# Altium PCB LaserControlBoard.PcbDoc
Units mm, origin at the board's own origin, x right, y up, seen from the top; angles counter-clockwise.
Board outline 112.65 x 119.38 mm, 2 copper layers (Top Layer, Bottom Layer); 111 components, 122 nets, 405 pads, 52 vias.
Unrouted connection lines stored in the file: 114.
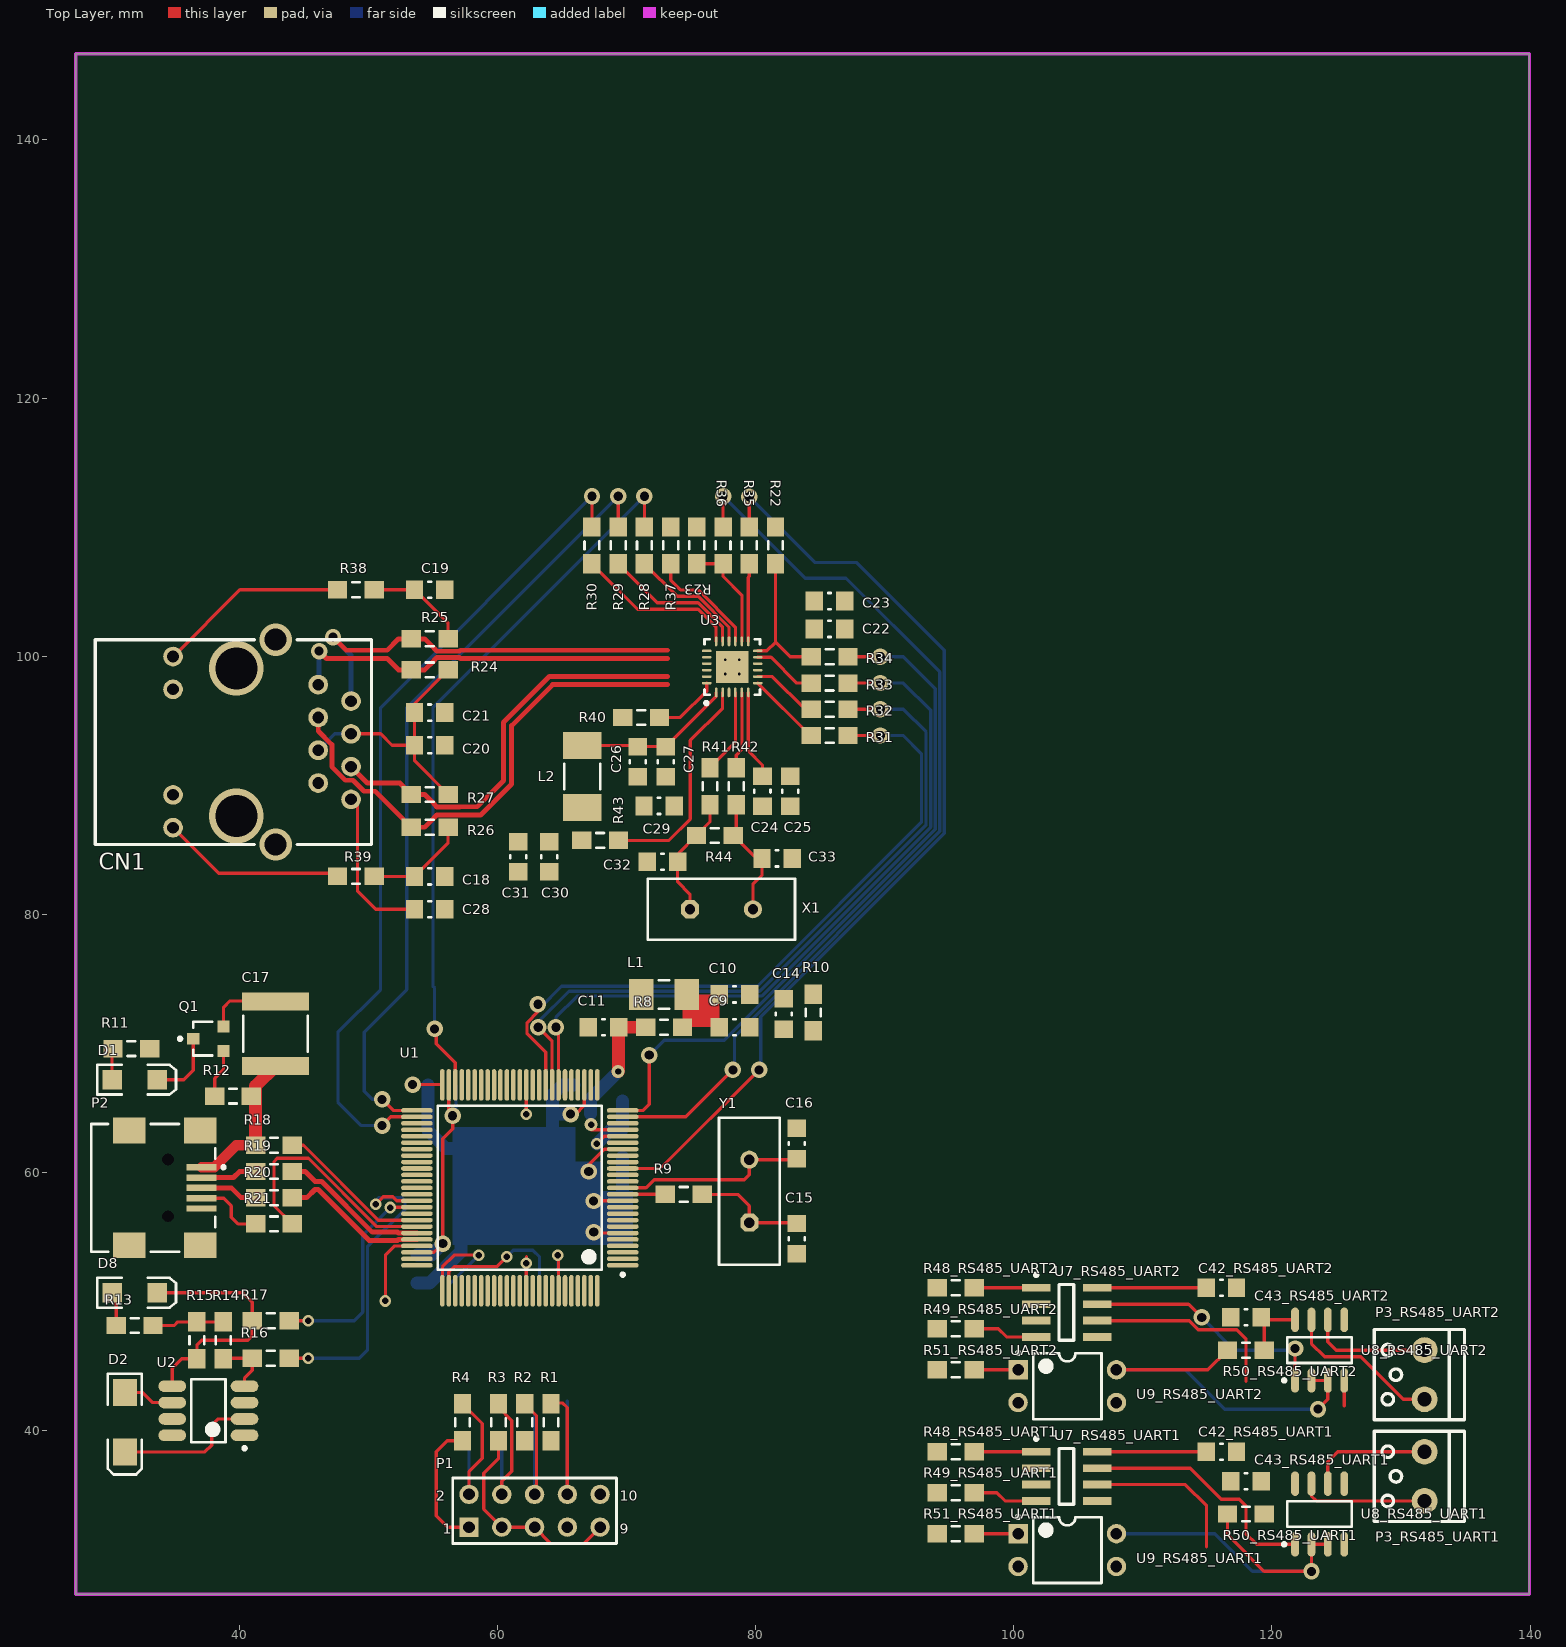
[diagram p0: Top Layer view]
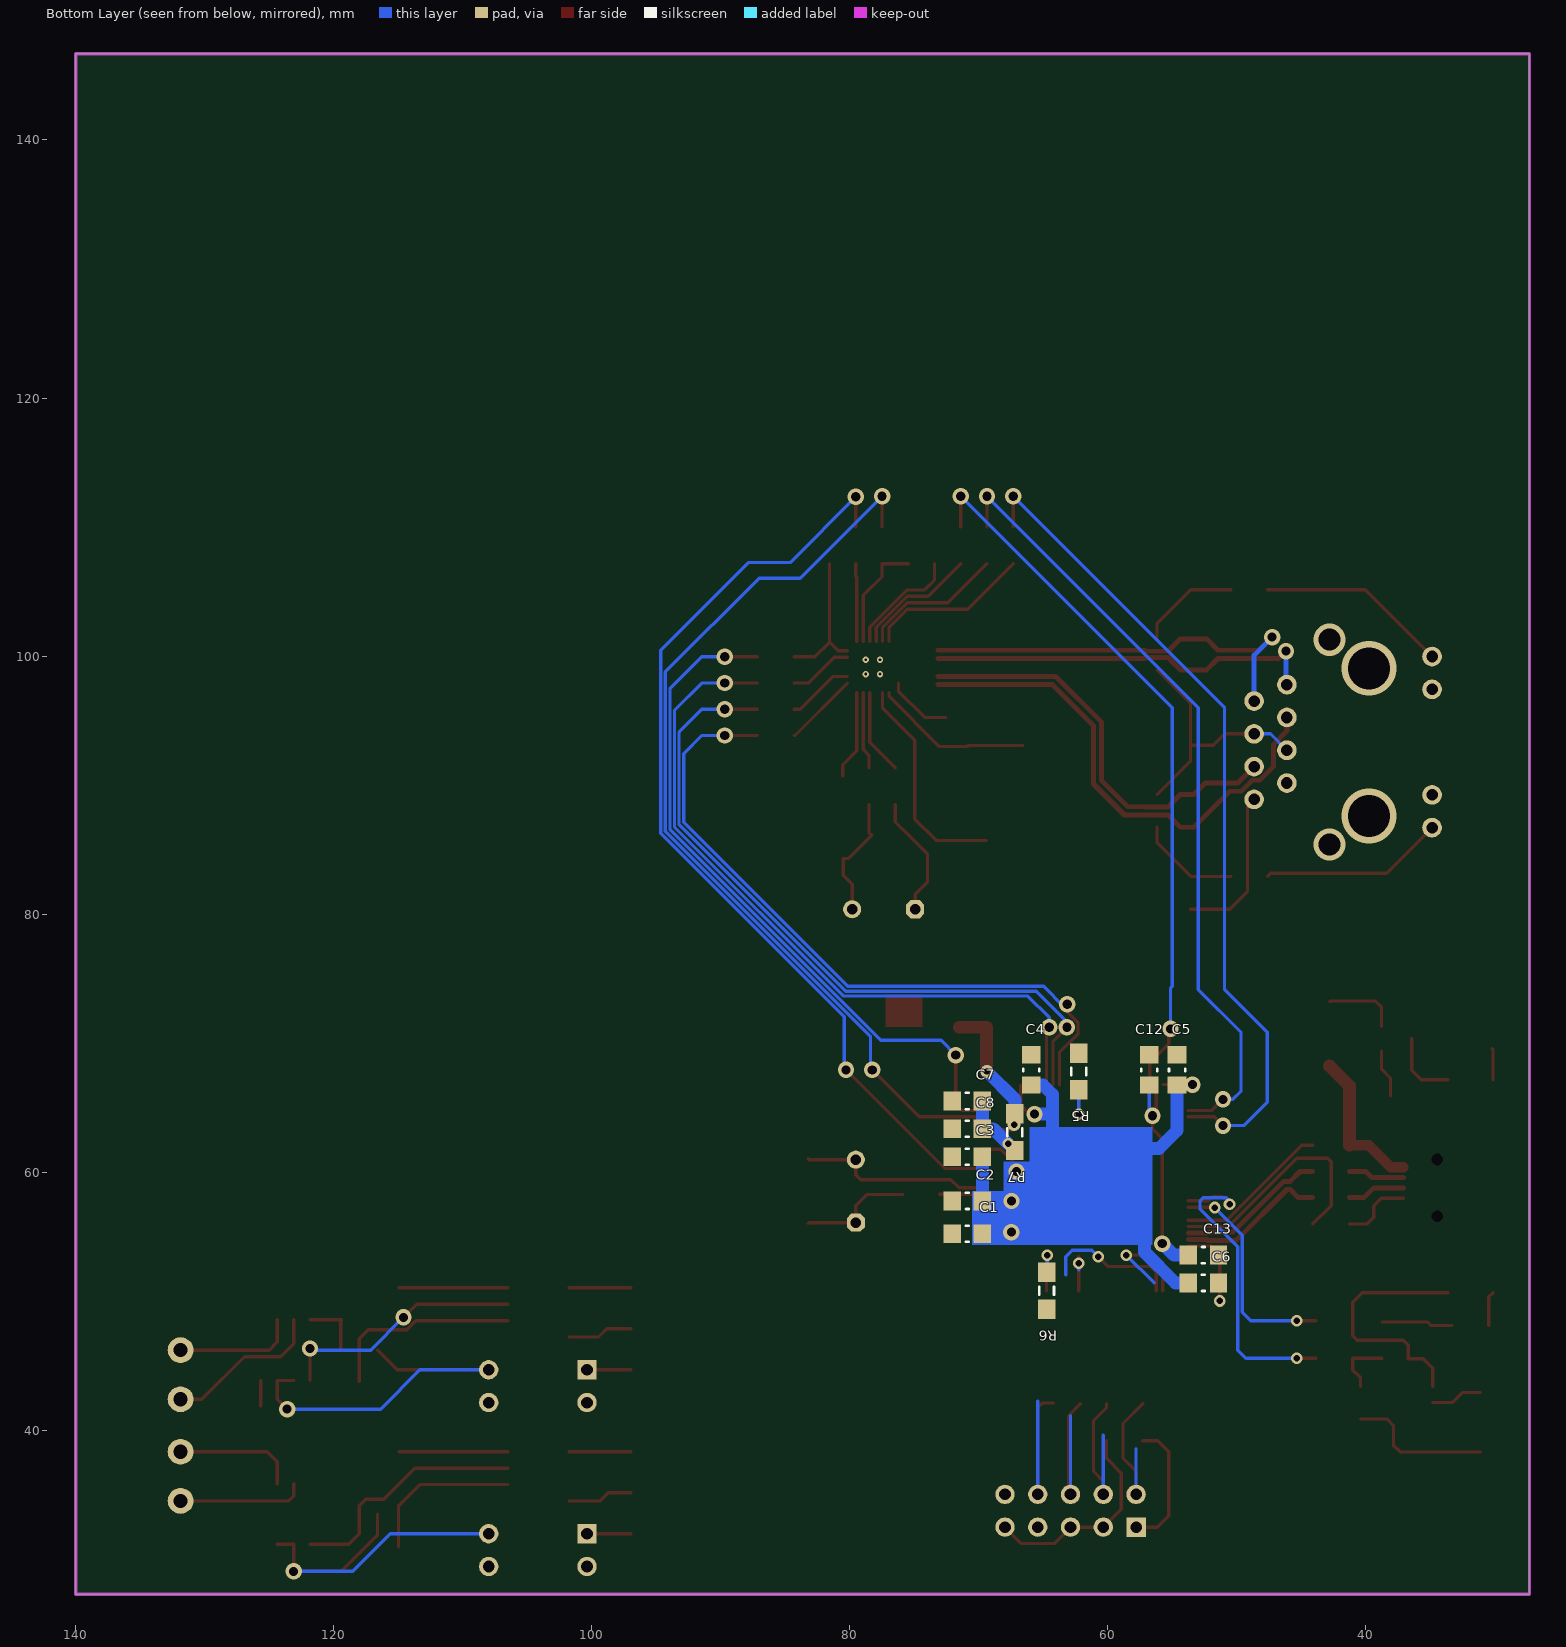
[diagram p1: Bottom Layer view, seen from below]

## Layer stack, top to bottom
Top Solder: solder mask 0.0102, Solder Resist, Dk 3.5
Top Layer: signal copper 0.0356
Dielectric 1: dielectric 0.32, FR-4, Dk 4.8
Bottom Layer: signal copper 0.0356
Bottom Solder: solder mask 0.0102, Solder Resist, Dk 3.5

## Board outline
27.305,27.305 139.954,27.305 139.954,146.685 27.305,146.685

## Design rules (kind name [scope] priority, off if disabled: settings)
Clearance [All] p1: gap=0.1
DiffPairsRouting [All] p1: maxlimit=0.254 minlimit=0.254 mostfreqgap=0.254 toplayer_minwidth=0.381 toplayer_maxwidth=0.381 toplayer_prefwidth=0.381 bottomlayer_minwidth=0.381 bottomlayer_maxwidth=0.381 bottomlayer_prefwidth=0.381 maxuncoupledlength=12.7
MinimumSolderMaskSliver [All] p1: minsoldermaskwidth=0
PolygonConnect [All] p1: connectstyle=Relief reliefconductorwidth=0.254 reliefentries=4 polygonreliefangle="90 Angle" airgapwidth=0.254
RoomDefinition EthernetPHY [InComponentClass('EthernetPHY')] p1: confinementstyle=ConfineIn formatcopy=TRUE lockcomponents=FALSE outline 92.71,114.935 27.94,114.935 27.94,77.47 92.71,77.47
RoomDefinition RS485_UART1 [InComponentClass('RS485_UART1')] p2: confinementstyle=ConfineIn formatcopy=TRUE lockcomponents=FALSE outline 92.71,27.94 135.89,27.94 135.89,40.64 92.71,40.64
RoomDefinition MCU [InComponentClass('MCU')] p3: confinementstyle=ConfineIn formatcopy=TRUE lockcomponents=FALSE outline 92.71,77.47 47.625,77.47 47.625,27.94 92.71,27.94
RoomDefinition RS485_UART2 [InComponentClass('RS485_UART2')] p4: confinementstyle=ConfineIn formatcopy=TRUE lockcomponents=FALSE outline 92.71,40.64 135.89,40.64 135.89,53.34 92.71,53.34
RoomDefinition "USB OTG" [InComponentClass('USB OTG')] p5: confinementstyle=ConfineIn formatcopy=TRUE lockcomponents=FALSE outline 47.625,77.47 27.94,77.47 27.94,27.94 47.625,27.94
RoutingVias [InNetClass('SignalNets')] p1: holewidth=0.5 width=0.9 viastyle="Through Hole" minholewidth=0.5 minwidth=0.9 maxholewidth=0.8 maxwidth=1.2
RoutingVias RoutingVias_PowerNets [InNetClass('AnalogPowerNets')] p2: holewidth=1 width=1.4 viastyle="Through Hole" minholewidth=0.5 minwidth=1 maxholewidth=1 maxwidth=1.4
RoutingVias RoutingVias_AnalogPowerNets [InNetClass('AnalogPowerNets')] p3: holewidth=0.5 width=0.9 viastyle="Through Hole" minholewidth=0.5 minwidth=1 maxholewidth=0.7 maxwidth=1.2
RoutingVias RoutingVias_All [All] p4: holewidth=0.711 width=1.27 viastyle="Through Hole" minholewidth=0.711 minwidth=1.27 maxholewidth=0.711 maxwidth=1.27
SolderMaskExpansion [All] p1: expansion=0.102
Width [InNetClass('SignalNets')] p1: maxlimit=1.016 minlimit=0.254 preferedwidth=0.254
Width Width_AnalogPowerNets [InNetClass('AnalogPowerNet')] p2: maxlimit=1.016 minlimit=0.128 preferedwidth=0.508
Width Width_PowerNets [InNetClass('PowerNet')] p3: maxlimit=1.016 minlimit=0.128 preferedwidth=0.508
Width Width_All [All] p4: maxlimit=0.254 minlimit=0.254 preferedwidth=0.254
27 further rules are at their usual default settings.

## Classes and differential pairs
component class RS485_UART1: C42_RS485_UART1 C43_RS485_UART1 P3_RS485_UART1 R48_RS485_UART1 R49_RS485_UART1 R50_RS485_UART1 R51_RS485_UART1 U7_RS485_UART1 U8_RS485_UART1 U9_RS485_UART1
component class RS485_UART2: C42_RS485_UART2 C43_RS485_UART2 P3_RS485_UART2 R48_RS485_UART2 R49_RS485_UART2 R50_RS485_UART2 R51_RS485_UART2 U7_RS485_UART2 U8_RS485_UART2 U9_RS485_UART2
net class MCU_RTS[1..2]: MCU_RTS1 MCU_RTS2
net class MCU_RX[1..2]: MCU_RX1 MCU_RX2
net class MCU_TX[1..2]: MCU_TX1 MCU_TX2
channel class RS485: RS485_UART1 RS485_UART2
net class PORTE[0..15]: PORTE0 PORTE1 PORTE2 PORTE3 PORTE4 PORTE5 PORTE6 PORTE7 PORTE8 PORTE9 PORTE10 PORTE11 PORTE12 PORTE13 PORTE14 PORTE15
component class MCU: C1 C2 C3 C4 C5 C6 C7 C8 C9 C10 C11 C12 C13 C14 C15 C16 L1 P1 R1 R2 R3 R4 R5 R6 R7 R8 R9 R10 U1 Y1
component class "USB OTG": C17 D1 D2 D8 P2 Q1 R11 R12 R13 R14 R15 R16 R17 R18 R19 R20 R21 U2
net class PowerNet: +5V NetC12_2 NetC17_1 VCC
component class EthernetPHY: C18 C19 C20 C21 C22 C23 C24 C25 C26 C27 C28 C29 C30 C31 C32 C33 CN1 L2 R22 R23 R24 R25 R26 R27 R28 R29 R30 R31 R32 R33 R34 R35 R36 R37 R38 R39 R40 R41 R42 R43 R44 U3 X1
net class AnalogPowerNet: AVCC NetC7_2
net class Undefined: AVCC VCC
differential pair ETH_TD: +ETH_TD_P -ETH_TD_N
differential pair ETH_RD: +ETH_RD_P -ETH_RD_N
differential pair USB: +USB_P -USB_N
differential pair USBCON: +USBCON_P -USBCON_N

## Components (designator, comment, footprint, x,y, rotation, side; value= is the part's Value field where it differs from the comment)
C1 "ChipCap" CAP0805 70.866,55.245 r0 bottom
C2 "ChipCap" CAP0805 70.866,57.785 r0 bottom
C3 "ChipCap" CAP0805 70.866,61.214 r0 bottom
C4 "ChipCap" CAP0805 65.913,67.945 r270 bottom
C5 "ChipCap" CAP0805 54.61,67.945 r270 bottom
C6 "ChipCap" CAP0805 52.578,51.435 r0 bottom
C7 "ChipCap" CAP0805 70.866,65.532 r180 bottom
C8 "ChipCap" CAP0805 70.866,63.373 r180 bottom
C9 "ChipCap" CAP0805 78.359,71.247 r180 top
C10 "ChipCap" CAP0805 78.359,73.787 r180 top
C11 "ChipCap" CAP0805 68.199,71.247 r0 top
C12 "ChipCap" CAP0805 56.769,67.945 r270 bottom
C13 "ChipCap" CAP0805 52.578,53.594 r0 bottom
C14 "ChipCap" CAP0805 82.169,72.263 r90 top
C15 "ChipCap" CAP0805 83.185,54.864 r90 top
C16 "ChipCap" CAP0805 83.185,62.23 r270 top
C17 "Cap Pol3" 2220 42.799,70.739 r90 top
C18 "ChipCap" CAP0805 54.737,82.931 r180 top
C19 "ChipCap" CAP0805 54.737,105.156 r180 top
C20 "ChipCap" CAP0805 54.737,93.091 r180 top
C21 "ChipCap" CAP0805 54.737,95.631 r180 top
C22 "ChipCap" CAP0805 85.725,102.108 r180 top
C23 "ChipCap" CAP0805 85.725,104.267 r180 top
C24 "ChipCap" CAP0805 80.518,89.535 r90 top
C25 "ChipCap" CAP0805 82.677,89.535 r90 top
C26 "ChipCap" CAP0805 70.866,91.821 r90 top
C27 "ChipCap" CAP0805 73.025,91.821 r90 top
C28 "ChipCap" CAP0805 54.737,80.391 r180 top
C29 "ChipCap" CAP0805 72.517,88.392 r0 top
C30 "ChipCap" CAP0805 64.008,84.455 r90 top
C31 "ChipCap" CAP0805 61.595,84.455 r90 top
C32 "ChipCap" CAP0805 72.771,84.074 r0 top
C33 "ChipCap" CAP0805 81.661,84.328 r180 top
C42_RS485_UART1 "ChipCap" CAP0805 116.078,38.354 r180 top (schematic designator C42)
C42_RS485_UART2 "ChipCap" CAP0805 116.078,51.054 r180 top (schematic designator C42)
C43_RS485_UART1 "ChipCap" CAP0805 117.983,36.068 r180 top (schematic designator C43)
C43_RS485_UART2 "ChipCap" CAP0805 117.983,48.768 r180 top (schematic designator C43)
CN1 "HY911105A" HR911105A 46.101,90.17 r90 top
D1 "LED2" 3.2X1.6X1.1 31.877,67.183 r0 top
D2 "BZG03C10" DO214 31.115,40.64 r270 top
D8 "LED2" 3.2X1.6X1.1 31.877,50.673 r0 top
L1 "Inductance" CM32 72.898,73.787 r0 top
L2 "Inductance" CM45 66.548,90.678 r90 top
P1 "Header 5X2" HDR2X5 57.785,32.512 r0 top
P2 "mini-USB" USB/SM0.8-6H5 29.21,58.801 r180 top
P3_RS485_UART1 "DG340-3.81" DG340-3.81-02P-00A(H) 131.826,34.544 r90 top (schematic designator P3)
P3_RS485_UART2 "DG340-3.81" DG340-3.81-02P-00A(H) 131.826,42.418 r90 top (schematic designator P3)
Q1 "BC847B" SOT23 37.592,70.358 r90 top
R1 "ChipRes" RES0805 64.135,40.64 r90 top
R2 "ChipRes" RES0805 62.103,40.64 r90 top
R3 "ChipRes" RES0805 60.071,40.64 r90 top
R4 "ChipRes" RES0805 57.277,40.64 r90 top
R5 "ChipRes" RES0805 62.23,67.818 r270 bottom
R6 "ChipRes" RES0805 64.722,50.826 r270 bottom
R7 "ChipRes" RES0805 67.183,63.119 r270 bottom
R8 "ChipRes" RES0805 72.898,71.247 r0 top
R9 "ChipRes" RES0805 74.422,58.293 r0 top
R10 "ChipRes" RES0805 84.455,72.39 r270 top
R11 "ChipRes" RES0805 31.623,69.596 r0 top
R12 "ChipRes" RES0805 39.497,65.913 r180 top
R13 "ChipRes" RES0805 31.877,48.133 r0 top
R14 "ChipRes" RES0805 38.735,46.99 r90 top
R15 "ChipRes" RES0805 36.703,46.99 r90 top
R16 "ChipRes" RES0805 42.418,45.593 r180 top
R17 "ChipRes" RES0805 42.418,48.514 r180 top
R18 "ChipRes" RES0805 42.672,62.103 r180 top
R19 "ChipRes" RES0805 42.672,60.071 r180 top
R20 "ChipRes" RES0805 42.672,58.039 r180 top
R21 "ChipRes" RES0805 42.672,56.007 r180 top
R22 "ChipRes" RES0805 81.534,108.585 r90 top
R23 "ChipRes" RES0805 75.438,108.585 r90 top
R24 "ChipRes" RES0805 54.737,98.933 r0 top
R25 "ChipRes" RES0805 54.737,101.346 r0 top
R26 "ChipRes" RES0805 54.737,86.741 r0 top
R27 "ChipRes" RES0805 54.737,89.281 r0 top
R28 "ChipRes" RES0805 71.374,108.585 r270 top
R29 "ChipRes" RES0805 69.342,108.585 r270 top
R30 "ChipRes" RES0805 67.31,108.585 r270 top
R31 "ChipRes" RES0805 85.725,93.853 r180 top
R32 "ChipRes" RES0805 85.725,95.885 r180 top
R33 "ChipRes" RES0805 85.725,97.917 r180 top
R34 "ChipRes" RES0805 85.725,99.949 r180 top
R35 "ChipRes" RES0805 79.502,108.585 r270 top
R36 "ChipRes" RES0805 77.47,108.585 r270 top
R37 "ChipRes" RES0805 73.406,108.585 r270 top
R38 "ChipRes" RES0805 49.022,105.156 r180 top
R39 "ChipRes" RES0805 49.022,82.931 r180 top
R40 "ChipRes" RES0805 71.12,95.25 r0 top
R41 "ChipRes" RES0805 76.454,89.916 r90 top
R42 "ChipRes" RES0805 78.486,89.916 r90 top
R43 "ChipRes" RES0805 67.945,85.725 r0 top
R44 "ChipRes" RES0805 76.835,86.106 r0 top
R48_RS485_UART1 "ChipRes" RES0805 95.504,38.354 r0 top (schematic designator R48)
R48_RS485_UART2 "ChipRes" RES0805 95.504,51.054 r0 top (schematic designator R48)
R49_RS485_UART1 "ChipRes" RES0805 95.504,35.179 r0 top (schematic designator R49)
R49_RS485_UART2 "ChipRes" RES0805 95.504,47.879 r0 top (schematic designator R49)
R50_RS485_UART1 "ChipRes" RES0805 117.983,33.528 r0 top (schematic designator R50)
R50_RS485_UART2 "ChipRes" RES0805 117.983,46.228 r0 top (schematic designator R50)
R51_RS485_UART1 "ChipRes" RES0805 95.504,32.004 r0 top (schematic designator R51)
R51_RS485_UART2 "ChipRes" RES0805 95.504,44.704 r0 top (schematic designator R51)
U1 "STM32F407" LQFP100 61.722,58.801 r180 top
U2 "STMPS2141" SOP8 37.592,41.529 r180 top
U3 "LAN8720" QFN50P375X375X85_HS-25N 78.179,99.166 r90 top
U7_RS485_UART1 "HCPL0631" SOIC8 101.727,38.354 r0 top (schematic designator U7)
U7_RS485_UART2 "HCPL0631" SOIC8 101.727,51.054 r0 top (schematic designator U7)
U8_RS485_UART1 "ADM1485" SO-8_L 123.698,33.528 r90 top (schematic designator U8)
U8_RS485_UART2 "ADM1485" SO-8_L 123.698,46.228 r90 top (schematic designator U8)
U9_RS485_UART1 "Optoisolator1" DIP-4 104.14,30.734 r0 top (schematic designator U9)
U9_RS485_UART2 "Optoisolator1" DIP-4 104.14,43.434 r0 top (schematic designator U9)
X1 "XTAL" BCY-W2/E4.7 77.343,80.391 r0 top
Y1 "ECS-10-13-1" HC-49U 79.502,58.547 r90 top

## Footprints (in the part's own frame and the unit in brackets; to place one, negate y for a bottom-side part, rotate by r counter-clockwise, add the part's x,y. Pads: shape width x height; smd on the part's side, far side on the other; paste and mask are expansions set on the pad)
3.2X1.6X1.1 [mm] "SMT LED; 2 Flat Leads"
  rect 1.5x1.5 smd: 1(-1.75,0) 2(1.75,0)
  silkscreen extent -2.9,-1.15 3.2,1.15
2220 [mm] "Chip Capacitor, Body 5.7x5.0mm, IPC High Density"
  rect 1.4x5.2 smd: 1(-2.5,0) 2(2.5,0)
  silkscreen extent -1.4,-2.5 1.4,2.5, body extent -2.95,-2.63 2.95,2.63, height 1.4
BCY-W2/E4.7 [mm] "Quartz Crystal, Thru-Hole; 2 Leads; Body 11.35 x 4.65 x 13.46 mm (LxWxH max)"
  oct 1.4x1.4 hole 0.8: 1(-2.44,0)
  round 1.4 hole 0.8: 2(2.44,0)
  silkscreen extent -5.7,-2.35 5.7,2.35
CAP0805 [mm]
  rect 1.35x1.45 smd: 1(-1.175,0) 2(1.175,0)
  silkscreen extent -0.1,-0.63 0.1,0.63, body extent -1.4,-0.65 1.4,0.65, height 0.55
CM32 [mm]
  rect 1.9x2.4 smd: 1(-1.75,0) 2(1.75,0)
  silkscreen extent -0.4,-1.1 0.4,1.1, body extent -2.3,-1.2 2.3,1.2, height 0.55
CM45 [mm]
  rect 2.1x2.99 smd: 1(-2.405,0) 2(2.405,0)
  silkscreen extent -1,-1.39 1,1.4, body extent -3,-1.5 3,1.5, height 0.55
DG340-3.81-02P-00A(H) [mm] "Terminal block"
  round 2 hole 1.1: 1(0,0) 2(3.81,0)
  silkscreen extent -1.59,-3.1 5.4,3.9
DIP-4 [mm] "DIP; 4 Leads; Row Spacing 7.62 mm; Pitch 2.54 mm"
  rect 1.5x1.5 hole 0.9: 1(-3.81,1.27)
  round 1.5 hole 0.9: 2(-3.81,-1.27) 3(3.81,-1.27) 4(3.81,1.27)
  silkscreen extent -3.93,-2.55 2.65,2.69, body extent -3.15,-2.5 3.15,2.5, height 5.6
DO214 [mm] "DO-214-AC/SMA; 2 C-Bend Leads; Body 5.3 x 2.6 mm, inc. leads (LxW)"
  rect 2.1x1.85 smd: 1(-2.3,0) 2(2.3,0)
  silkscreen extent -3.75,-1.33 4.05,1.33
HC-49U [mm] "Quartz Crystal, Thru-Hole; 2 Leads; Body 11.35 x 4.65 x 13.46 mm (LxWxH max)"
  oct 1.4x1.4 hole 0.8: 1(-2.44,0)
  round 1.4 hole 0.8: 2(2.44,0)
  silkscreen extent -5.7,-2.35 5.7,2.35
HDR2X5 [mm] "Connector; Header; 5x2 Position"
  rect 1.5x1.5 hole 0.9: 1(0,0)
  round 1.5 hole 0.9: 2(0,2.54) 3(2.54,0) 4(2.54,2.54) 5(5.08,0) 6(5.08,2.54) 7(7.62,0) 8(7.62,2.54) 9(10.16,0) 10(10.16,2.54)
  silkscreen extent -1.27,-1.27 11.43,3.81
HR911105A [mil] "Ethernet connector"
  round 60 hole 35.43: 1(300,0) 2(250,-100) 3(200,0) 4(150,-100) 5(100,0) 6(50,-100) 7(0,0) 8(-50,-100) 9(385.83,442.91) 10(285.83,442.91) 11(-36.22,442.91) 12(-136.22,442.91)
  silkscreen extent -188,-163 437,680
LQFP100 [mm]
  oval 2.45x0.35 smd: 1(-7.975,6) 2(-7.975,5.5) 3(-7.975,5) 4(-7.975,4.5) 5(-7.975,4) 6(-7.975,3.5) 7(-7.975,3) 8(-7.975,2.5) 9(-7.975,2) 10(-7.975,1.5) 11(-7.975,1) 12(-7.975,0.5) 13(-7.975,0) 14(-7.975,-0.5) 15(-7.975,-1) 16(-7.975,-1.5) 17(-7.975,-2) 18(-7.975,-2.5) 19(-7.975,-3) 20(-7.975,-3.5) 21(-7.975,-4) 22(-7.975,-4.5) 23(-7.975,-5) 24(-7.975,-5.5) 25(-7.975,-6) 51(7.975,-6) 52(7.975,-5.5) 53(7.975,-5) 54(7.975,-4.5) 55(7.975,-4) 56(7.975,-3.5) 57(7.975,-3) 58(7.975,-2.5) 59(7.975,-2) 60(7.975,-1.5) 61(7.975,-1) 62(7.975,-0.5) 63(7.975,0) 64(7.975,0.5) 65(7.975,1) 66(7.975,1.5) 67(7.975,2) 68(7.975,2.5) 69(7.975,3) 70(7.975,3.5) 71(7.975,4) 72(7.975,4.5) 73(7.975,5) 74(7.975,5.5) 75(7.975,6)
  oval 0.35x2.45 smd: 26(-6,-7.975) 27(-5.5,-7.975) 28(-5,-7.975) 29(-4.5,-7.975) 30(-4,-7.975) 31(-3.5,-7.975) 32(-3,-7.975) 33(-2.5,-7.975) 34(-2,-7.975) 35(-1.5,-7.975) 36(-1,-7.975) 37(-0.5,-7.975) 38(0,-7.975) 39(0.5,-7.975) 40(1,-7.975) 41(1.5,-7.975) 42(2,-7.975) 43(2.5,-7.975) 44(3,-7.975) 45(3.5,-7.975) 46(4,-7.975) 47(4.5,-7.975) 48(5,-7.975) 49(5.5,-7.975) 50(6,-7.975) 76(6,7.975) 77(5.5,7.975) 78(5,7.975) 79(4.5,7.975) 80(4,7.975) 81(3.5,7.975) 82(3,7.975) 83(2.5,7.975) 84(2,7.975) 85(1.5,7.975) 86(1,7.975) 87(0.5,7.975) 88(0,7.975) 89(-0.5,7.975) 90(-1,7.975) 91(-1.5,7.975) 92(-2,7.975) 93(-2.5,7.975) 94(-3,7.975) 95(-3.5,7.975) 96(-4,7.975) 97(-4.5,7.975) 98(-5,7.975) 99(-5.5,7.975) 100(-6,7.975)
  silkscreen extent -8.1,-6.35 6.35,6.85, body extent -7.15,-7.15 7.15,7.15, height 2.45
QFN50P375X375X85_HS-25N [mm] "QFN, 24-Leads, Body 4.00x4.00mm, Pitch 0.50mm, Thermal Pad 2.50x2.50mm, IPC Medium Density"
  oval 0.75x0.2 smd: 1(-1.975,1.25) 2(-1.975,0.75) 3(-1.975,0.25) 4(-1.975,-0.25) 5(-1.975,-0.75) 6(-1.975,-1.25) 13(1.975,-1.25) 14(1.975,-0.75) 15(1.975,-0.25) 16(1.975,0.25) 17(1.975,0.75) 18(1.975,1.25)
  oval 0.2x0.75 smd: 7(-1.25,-1.975) 8(-0.75,-1.975) 9(-0.25,-1.975) 10(0.25,-1.975) 11(0.75,-1.975) 12(1.25,-1.975) 19(1.25,1.975) 20(0.75,1.975) 21(0.25,1.975) 22(-0.25,1.975) 23(-0.75,1.975) 24(-1.25,1.975)
  rect 2.5x2.5 smd: 25(0,0)
  silkscreen extent -2.92,-2.15 2.15,2.15, body extent -2,-2 2,2, height 0.85
RES0805 [mm] "Chip Resistor, 2-Leads, Body 3.40x1.30mm, IPC Medium Density"
  rect 1.5x1.35 smd: 1(-1.425,0) 2(1.425,0)
  silkscreen extent -0.3,-0.58 0.3,0.58, body extent -1.7,-0.65 1.7,0.65, height 0.55
SO-8_L [mm] "8-Pin Small Outline Integrated Circuit 1.27 mm Pitch, IPC High Density"
  oval 1.9x0.6 smd: 1(-2.35,1.905) 2(-2.35,0.635) 3(-2.35,-0.635) 4(-2.35,-1.905) 5(2.35,-1.905) 6(2.35,-0.635) 7(2.35,0.635) 8(2.35,1.905)
  silkscreen extent -2.47,-2.5 1,2.88, body extent -1.95,-2.45 1.95,2.45, height 1.75
SOIC8 [mm]
  rect 2.2x0.6 smd: 1(0,0) 2(0,-1.27) 3(0,-2.54) 4(0,-3.81) 5(4.724,-3.81) 6(4.724,-2.54) 7(4.724,-1.27) 8(4.724,0)
  silkscreen extent -0.13,-4.06 2.92,1.14
SOP8 [mm] "SOP, 8-Leads, Body 4.90x3.90mm, Pitch 1.27mm, IPC Medium Density"
  oval 2.15x0.9 smd: 1(-2.8,1.905) 2(-2.8,0.635) 3(-2.8,-0.635) 4(-2.8,-1.905) 5(2.8,-1.905) 6(2.8,-0.635) 7(2.8,0.635) 8(2.8,1.905)
  silkscreen extent -2.93,-2.45 1.33,3.03, body extent -1.95,-2.45 1.95,2.45, height 1.75
SOT23 [mm] "SOT-23; 3 Leads; Body 3.1 x 2.5 mm, inc. leads (LxW max), Alternate Lead Configuration"
  rect 0.9x0.95 smd: 1(0,1.175) 2(0.95,-1.175) 3(-0.95,-1.175)
  silkscreen extent -1.3,-0.3 1.3,2.32
USB/SM0.8-6H5 [mm] "Connector; USB2.0, Type B, SM; 5 Position; Right Angle"
  rect 2.3x0.5 smd: 1(-7.85,-1.6) 2(-7.85,-0.8) 3(-7.85,0) 4(-7.85,0.8) 5(-7.85,1.6)
  rect 2.5x2 smd: 6(-7.75,4.45) 7(-2.25,4.45) 8(-7.75,-4.45) 9(-2.25,-4.45)
  round 0.6 hole 0.9 unplated: MH1(-5.25,2.2) MH2(-5.25,-2.2)
  silkscreen extent -9.68,-4.95 0.7,4.95, body extent -8.9,-4.95 0.7,4.95, height 3.9

## Part data
C1 C2 C3 C4 C5 C6 C7 C8 C9 C10 C11 C12 C13 C14 C15 C16 C18 C19 C20 C21 C22 C23 C24 C25 C26 C27 C28 C29 C30 C31 C32 C33 C42_RS485_UART1 C42_RS485_UART2 C43_RS485_UART1 C43_RS485_UART2: "Capacitor"
C17: "Polarized Capacitor (Surface Mount)"
D1 D8: "Typical RED, GREEN, YELLOW, AMBER GaAs LED"
D2: "Silicon Zener Diode (3W)"
L1 L2: library part ChipInductance
P1: "Header, 5-Pin, Dual row"
P2: library part miniUSB
P3_RS485_UART1 P3_RS485_UART2: library part DG340-3.81-02P, "Terminal block"
Q1: "SOT23 NPN Silicon Planar General Purpose Transistor"
R1 R2 R3 R4 R5 R6 R7 R8 R9 R10 R11 R12 R13 R14 R15 R16 R17 R18 R19 R20 R21 R22 R23 R24 R25 R26 R27 R28 R29 R30 R31 R32 R33 R34 R35 R36 R37 R38 R39 R40 R41 R42 R43 R44 R48_RS485_UART1 R48_RS485_UART2 R49_RS485_UART1 R49_RS485_UART2 R50_RS485_UART1 R50_RS485_UART2 R51_RS485_UART1 R51_RS485_UART2: "Chip resistor"
U1: library part STM32F407VGT6, "ST Microcontroller ARM 32-bit Cortex M4"
U2: "Enhanced single channel power switch"
U3: library part LAM8720, "Small Footprint RMII 10/100 Ethernet  Transceiver"
U7_RS485_UART1 U7_RS485_UART2: "2-channel opto-coupler"
U8_RS485_UART1 U8_RS485_UART2: "5 V Low Power  EIA RS-485 Transceiver"
U9_RS485_UART1 U9_RS485_UART2: "4-Pin Phototransistor Optocoupler"
X1: library part "Crystall oscillator", "Quartz crystall oscillator"
Y1: "Crystal Oscillator"

## Via types
v1: diameter 1.27, hole 0.711, Top Layer to Bottom Layer, 31 vias
v2: diameter 0.9, hole 0.5, Top Layer to Bottom Layer, 11 vias
v3: diameter 0.5, hole 0.2, Top Layer to Bottom Layer, 4 vias
v4: diameter 1, hole 0.5, Top Layer to Bottom Layer, 2 vias
v5: diameter 4.25, hole 3.25, Top Layer to Bottom Layer, 2 vias
v6: diameter 2.5, hole 1.7, Top Layer to Bottom Layer, 2 vias

## Nets (pads, with @x,y where several pads share a name; then routed paths per layer and width w, separated by ;. In a path a pad name is that pad's centre, name@x,y a point inside that pad or via, vN(x,y) a via of type N, cw(c..) or ccw(c..) an arc to the next point about the centre after c; other vN are vias at no path point)
#RESET: C14.1 P1.10 R10.2 U1.14
+5V: D2.2 U2.2 | length 11.2
  Top Layer w0.254: D2.2 37.324,38.34 37.846,38.862 37.846,40.386 38.354,40.894 U2.2
AVCC: C11.2 R7.1 R8.1 U1.22 | length 13.4
  Top Layer w0.254: v4(67.238,63.699) 67.238,63.301 U1.22
  Top Layer w1: v4(69.342,67.818) 69.374,67.85 C11.2 R8.1
  Bottom Layer w0.254: R7.1 67.183,63.754 v4(67.238,63.699)
  Bottom Layer w1: R7.1 67.183,65.659 v4(69.342,67.818)
AVCC5V: C42_RS485_UART1.2 C42_RS485_UART2.2 C43_RS485_UART1.1 C43_RS485_UART2.1 R50_RS485_UART1.2 R50_RS485_UART2.2 U7_RS485_UART1.8 U7_RS485_UART2.8 U8_RS485_UART1.8 U8_RS485_UART2.8 | length 21.7
  Top Layer w0.254: U7_RS485_UART1.8 C42_RS485_UART1.2 ; U7_RS485_UART2.8 C42_RS485_UART2.2 ; R50_RS485_UART2.2 119.408,48.518 119.348,48.578 U8_RS485_UART2.8
ETH_RD_N: CN1.6 R27.1 U3.22 | length 32.7
  Top Layer w0.381: CN1.6 49.911,90.17 52.423,90.17 R27.1 54.356,89.281 55.121,88.516 55.121,88.486 55.292,88.315 57.032,88.315 57.045,88.328 58.42,88.328 60.452,90.36 60.452,94.878 63.999,98.425 73.152,98.425
ETH_RD_P: CN1.3 R26.1 U3.23 | length 39.4
  Top Layer w0.381: CN1.3 46.101,94.198 47.153,93.146 47.153,91.439 48.205,90.387 48.795,90.387 49.648,89.535 50.518,89.535 R26.1 54.356,86.741 55.121,87.506 55.121,87.536 55.292,87.706 57.032,87.706 57.045,87.693 58.683,87.693 61.087,90.097 61.087,94.615 64.262,97.79 73.152,97.79
ETH_TD_N: CN1.2 R25.1 U3.20 | length 32.7
  Top Layer w0.381: v1(47.244,101.473) 48.26,100.457 51.435,100.457 52.324,101.346 R25.1 54.356,101.346 55.121,100.581 55.121,100.551 55.292,100.38 57.032,100.38 57.109,100.457 73.152,100.457
  Bottom Layer w0.381: v1(47.244,101.473) 48.641,100.076 CN1.2
ETH_TD_P: CN1.1 R24.1 U3.21 | length 30.7
  Top Layer w0.381: v1(46.166,100.395) 46.74,99.822 51.435,99.822 52.324,98.933 R24.1 54.356,98.933 55.121,99.698 55.121,99.728 55.292,99.898 57.032,99.898 57.109,99.822 73.152,99.822
  Bottom Layer w0.381: CN1.1 46.166,97.855 v1(46.166,100.395)
GND: C1.2 C2.2 C3.2 C4.1 C5.1 C6.1 C7.1 C8.1 C9.1 C10.1 C11.1 C12.1 C13.1 C14.2 C15.1 C16.1 C17.2 C18.1 C19.1 C20.1 C21.1 C22.1 C23.1 C24.1 C25.1 C26.1 C27.1 C28.1 C29.1 C30.1 C31.1 C32.1 C33.1 C42_RS485_UART1.1 C42_RS485_UART2.1 C43_RS485_UART1.2 C43_RS485_UART2.2 P1.3 P1.5 P1.9 P2.5 P2.6 P2.7 P2.8 P2.9 Q1.2 R3.1 R5.1 R6.2 R40.1 R43.1 U1.10 U1.20 U1.27 U1.74 U1.99 U2.1 U3.25 U7_RS485_UART1.2 U7_RS485_UART1.3 U7_RS485_UART1.5 U7_RS485_UART2.2 U7_RS485_UART2.3 U7_RS485_UART2.5 U8_RS485_UART1.5 U8_RS485_UART2.5 U9_RS485_UART1.2 U9_RS485_UART1.3 U9_RS485_UART2.2 U9_RS485_UART2.3 | length 22.2
  Top Layer w0.254: Q1.2 38.767,72.803 39.243,73.279 42.759,73.279 C17.2 ; R3.1 60.071,37.846 58.928,36.703 58.928,33.909 P1.3 P1.5 64.135,31.242 66.675,31.242 P1.9
  other v3: 77.629,98.616 78.729,98.616 77.629,99.716 78.729,99.716
LED1_LINK: U3.3
LED2_SPEED: R43.2 U3.2 | length 17.1
  Top Layer w0.254: R43.2 73.279,85.725 74.93,87.376 74.93,93.472 77.429,95.971 U3.2
LINK_K: CN1.11
MCU_MISO: U1.79
MCU_MOSI: U1.80
MCU_RTS1: R51_RS485_UART1.1 U1.85
MCU_RTS2: R51_RS485_UART2.1 U1.59
MCU_RX1: R48_RS485_UART1.1 U1.87
MCU_RX2: R48_RS485_UART2.1 U1.56
MCU_SCK: U1.78
MCU_TX1: R49_RS485_UART1.1 U1.86
MCU_TX2: R49_RS485_UART2.1 U1.55
MDC: R35.1 U1.16 | length 74.6
  Top Layer w0.254: U1.16 72.62,60.301 v1(80.264,67.945) ; R35.1 v1(79.502,112.346)
  Bottom Layer w0.254: v1(79.502,112.346) 84.596,107.251 87.82,107.251 94.615,100.457 94.615,86.282 80.391,72.058 80.391,68.58 80.264,68.453 v1(80.264,67.945)
MDIO: R34.1 U1.25 | length 54.1
  Top Layer w0.254: U1.25 71.278,64.801 71.755,65.278 v1(71.755,69.088) ; R34.1 v1(89.662,99.949)
  Bottom Layer w0.254: v1(71.755,69.088) 72.898,70.231 77.562,70.231 93.907,86.576 93.907,97.482 91.44,99.949 v1(89.662,99.949)
NetC7_2: C7.2 C8.2 R7.2 U1.21 | length 6.9
  Top Layer w0.254: v2(67.691,62.23) 68.262,62.801 U1.21
  Bottom Layer w0.254: R7.2@67.691,62.202 v2(67.691,62.23)
  Bottom Layer w1: R7.2@67.691,62.202 68.862,63.373 C8.2 C7.2
NetC9_2: C9.2 C10.2 L1.2 R8.2
NetC12_2: C12.2 C13.2 U1.49 U1.73 | length 19.4
  Top Layer w0.254: U1.73 55.071,53.801 v1(55.753,54.483) 55.753,62.611 56.515,63.373 v1(56.515,64.389) 56.222,64.682 U1.49
  Bottom Layer w0.254: v1@56.769,64.77 C12.2
  Bottom Layer w1: C13.2 54.864,53.594 v1(55.753,54.483)
NetC15_2: C15.2 R9.2 Y1.1 | length 9
  Top Layer w0.254: R9.2 78.613,58.293 79.502,57.404 Y1.1 83.117,56.107 C15.2
NetC16_2: C16.2 U1.13 Y1.2 | length 15.1
  Top Layer w0.254: U1.13 71.501,58.801 72.136,59.436 79.121,59.436 79.502,59.817 Y1.2 83.117,60.987 C16.2
NetC17_1: C17.1 D2.1 P2.1 R12.1 R18.2 U2.6 | length 15.7
  Top Layer w0.254: D2.1 32.498,42.94 33.274,42.164 U2.6
  Top Layer w0.8: P2.1 38.049,60.401 39.751,62.103 R18.2
  Top Layer w1: R18.2 41.247,66.687 C17.1
NetC26_2: C26.2 C27.2 L2.2 U3.1 U3.19 | length 12.3
  Top Layer w0.254: L2.2 70.779,93.083 C26.2 C27.2 76.929,96.9 U3.1
NetC28_2: C28.2 CN1.8 | length 12.3
  Top Layer w0.254: CN1.8 49.149,88.392 49.149,81.788 50.546,80.391 C28.2
NetC29_2: C29.2 R41.2 U3.4 | length 6.7
  Top Layer w0.254: R41.2 78.429,93.316 U3.4
NetC32_2: C32.2 R41.1 R44.1 X1.1 | length 9.5
  Top Layer w0.254: X1.1 74.903,81.561 73.946,82.518 C32.2 73.946,84.642 R44.1 76.454,87.15 R41.1
NetC33_2: C33.2 R42.1 R44.2 X1.2 | length 9.7
  Top Layer w0.254: R42.1 78.486,86.332 R44.2 80.038,84.328 C33.2 80.486,83.026 79.783,82.323 X1.2
NetCN1_9: CN1.9 R38.2 | length 14.9
  Top Layer w0.254: CN1.9 40.037,105.156 R38.2
NetCN1_12: CN1.12 R39.2 | length 14.3
  Top Layer w0.254: CN1.12 38.376,83.185 47.343,83.185 R39.2
NetD1_1: D1.1 R11.1 | length 2.4
  Top Layer w0.254: D1.1 30.127,69.525 R11.1
NetD1_2: D1.2 Q1.1 | length 5.5
  Top Layer w0.254: D1.2 35.687,67.183 36.417,67.913 Q1.1
NetD8_1: D8.1 R13.1 | length 2.7
  Top Layer w0.254: D8.1 30.452,50.348 R13.1
NetD8_2: D8.2 R15.1 R17.2 U2.5 | length 19.5
  Top Layer w0.254: D8.2 40.259,50.673 40.993,49.939 R17.2 40.993,47.343 40.64,46.99 37.084,46.99 36.703,46.609 R15.1 35.532,45.565 34.792,44.825 U2.5
NetP2_4: P2.4 R21.2 | length 5.5
  Top Layer w0.254: P2.4 38.773,58.001 39.37,57.404 39.37,56.515 39.878,56.007 R21.2
NetP3_RS485_UART1_1: P3_RS485_UART1.1 U8_RS485_UART1.7 | length 9.9
  Top Layer w0.254: U8_RS485_UART1.7 123.063,34.925 123.444,34.544 P3_RS485_UART1.1
NetP3_RS485_UART1_2: P3_RS485_UART1.2 U8_RS485_UART1.6 | length 9.5
  Top Layer w0.254: U8_RS485_UART1.6 124.333,37.592 125.095,38.354 P3_RS485_UART1.2
NetP3_RS485_UART2_1: P3_RS485_UART2.1 U8_RS485_UART2.7 | length 12.4
  Top Layer w0.254: U8_RS485_UART2.7 123.063,46.736 124.079,45.72 126.873,45.72 130.175,42.418 P3_RS485_UART2.1
NetP3_RS485_UART2_2: P3_RS485_UART2.2 U8_RS485_UART2.6 | length 9.5
  Top Layer w0.254: U8_RS485_UART2.6 124.333,46.863 124.968,46.228 P3_RS485_UART2.2
NetQ1_3: Q1.3 R12.2 | length 3.8
  Top Layer w0.254: R12.2 38.072,67.282 38.767,67.977 Q1.3
NetR5_2: R5.2 U1.37 | length 4.1
  Top Layer w0.254: U1.37 62.222,64.524 v2(62.23,64.516)
  Bottom Layer w0.254: v2(62.23,64.516) R5.2
NetR6_1: R6.1 U1.94 | length 4.2
  Top Layer w0.254: v2(64.674,53.594) 64.722,53.546 U1.94
  Bottom Layer w0.254: v2(64.674,53.594) 64.674,52.299 R6.1
NetR9_1: R9.1 U1.12 | length 3.3
  Top Layer w0.254: U1.12 72.989,58.301 R9.1
NetR14_1: R14.1 R16.2 U2.4 | length 4.7
  Top Layer w0.254: R14.1 38.763,45.593 R16.2 40.993,44.676 40.392,44.075 U2.4
NetR22_1: R22.1 R34.2 U3.12 | length 11
  Top Layer w0.254: U3.12 80.858,100.416 81.534,101.092 ; R22.1 81.534,101.092 ; R34.2 82.677,99.949 81.534,101.092
NetR23_1: R23.1 R36.2 U3.14 | length 8.7
  Top Layer w0.254: R23.1 R36.2 77.47,106.172 78.929,104.713 U3.14
NetR28_2: R28.2 U3.16 | length 9.7
  Top Layer w0.254: R28.2 73.902,104.632 75.533,104.632 77.929,102.236 U3.16
NetR29_2: R29.2 U3.17 | length 11.2
  Top Layer w0.254: R29.2 72.37,104.132 75.533,104.132 77.429,102.236 U3.17
NetR30_2: R30.2 U3.18 | length 12.8
  Top Layer w0.254: R30.2 70.838,103.632 75.532,103.632 76.929,102.235 U3.18
NetR31_2: R31.2 U3.7 | length 5.8
  Top Layer w0.254: U3.7 84.217,93.853 R31.2
NetR32_2: R32.2 U3.8 | length 5.2
  Top Layer w0.254: U3.8 81.289,98.416 83.82,95.885 R32.2
NetR33_2: R33.2 U3.11 | length 5
  Top Layer w0.254: U3.11 81.186,99.916 83.185,97.917 R33.2
NetR35_2: R35.2 U3.13 | length 6
  Top Layer w0.254: U3.13 79.429,106.099 79.502,106.172 R35.2
NetR37_2: R37.2 U3.15 | length 8.9
  Top Layer w0.254: R37.2 73.406,105.894 74.168,105.132 75.534,105.132 78.429,102.237 U3.15
NetR40_2: R40.2 U3.24 | length 5.1
  Top Layer w0.254: R40.2 74.168,95.25 76.204,97.286 U3.24
NetR42_2: R42.2 U3.5 | length 6
  Top Layer w0.254: R42.2 78.486,92.329 78.929,92.772 U3.5
NetR48_RS485_UART1_2: R48_RS485_UART1.2 U7_RS485_UART1.1 | length 4.8
  Top Layer w0.254: R48_RS485_UART1.2 U7_RS485_UART1.1
NetR48_RS485_UART2_2: R48_RS485_UART2.2 U7_RS485_UART2.1 | length 4.8
  Top Layer w0.254: R48_RS485_UART2.2 U7_RS485_UART2.1
NetR49_RS485_UART1_2: R49_RS485_UART1.2 U7_RS485_UART1.4 | length 5.1
  Top Layer w0.254: R49_RS485_UART1.2 98.679,35.179 99.314,34.544 U7_RS485_UART1.4
NetR49_RS485_UART2_2: R49_RS485_UART2.2 U7_RS485_UART2.4 | length 5.1
  Top Layer w0.254: R49_RS485_UART2.2 98.806,47.879 99.441,47.244 U7_RS485_UART2.4
NetR50_RS485_UART1_1: R50_RS485_UART1.1 U8_RS485_UART1.2 U8_RS485_UART1.3 U9_RS485_UART1.4 | length 29
  Top Layer w0.254: R50_RS485_UART1.1 116.558,31.905 119.38,29.083 v1(123.063,29.083) U8_RS485_UART1.2 U8_RS485_UART1.3
  Bottom Layer w0.254: U9_RS485_UART1.4 115.57,32.004 118.491,29.083 v1(123.063,29.083)
NetR50_RS485_UART2_1: R50_RS485_UART2.1 U8_RS485_UART2.2 U8_RS485_UART2.3 U9_RS485_UART2.4 | length 29.9
  Top Layer w0.254: U9_RS485_UART2.4 115.034,44.704 R50_RS485_UART2.1 ; U8_RS485_UART2.2 U8_RS485_UART2.3 124.333,42.418 v1(123.571,41.656)
  Bottom Layer w0.254: U9_RS485_UART2.4 113.284,44.704 116.332,41.656 v1(123.571,41.656)
NetR51_RS485_UART1_2: R51_RS485_UART1.2 U9_RS485_UART1.1 | length 3.4
  Top Layer w0.254: R51_RS485_UART1.2 U9_RS485_UART1.1
NetR51_RS485_UART2_2: R51_RS485_UART2.2 U9_RS485_UART2.1 | length 3.4
  Top Layer w0.254: R51_RS485_UART2.2 U9_RS485_UART2.1
NetU7_RS485_UART1_6: U7_RS485_UART1.6 U8_RS485_UART1.4 | length 12.3
  Top Layer w0.254: U7_RS485_UART1.6 113.284,35.814 114.935,34.163 114.935,30.988
NetU7_RS485_UART1_7: U7_RS485_UART1.7 U8_RS485_UART1.1 | length 19.1
  Top Layer w0.254: U7_RS485_UART1.7 113.665,37.084 116.078,34.671 117.475,34.671 117.983,34.163 117.983,32.004 118.809,31.178 U8_RS485_UART1.1
NetU7_RS485_UART2_6: U7_RS485_UART2.6 U8_RS485_UART2.4 | length 17.4
  Top Layer w0.254: U7_RS485_UART2.6 113.589,48.514 114.287,47.816 117.284,47.816 117.983,47.117 117.983,43.815 ; 125.603,41.91 U8_RS485_UART2.4
NetU7_RS485_UART2_7: U7_RS485_UART2.7 U8_RS485_UART2.1 | length 19.4
  Top Layer w0.254: U7_RS485_UART2.7 113.538,49.784 v1(114.554,48.768) ; U8_RS485_UART2.1 v1(121.793,46.355)
  Bottom Layer w0.254: v1(114.554,48.768) 117.094,46.228 121.793,46.228 v1(121.793,46.355)
PORTE0: U1.97
PORTE1: U1.98
PORTE2: U1.1
PORTE3: U1.2
PORTE4: U1.3
PORTE5: U1.4
PORTE6: U1.5
PORTE7: U1.38
PORTE8: U1.39
PORTE9: U1.40
PORTE10: U1.41
PORTE11: U1.42
PORTE12: U1.43
PORTE13: U1.44
PORTE14: U1.45
PORTE15: U1.46
RESET_ETH: R37.1
RMII_CRS_DV: R33.1 U1.32 | length 56.8
  Top Layer w0.254: v1(64.516,71.247) 64.722,71.041 U1.32 ; R33.1 v1(89.662,97.917)
  Bottom Layer w0.254: v1(64.516,71.247) 64.516,72.009 66.167,73.66 80.453,73.66 93.553,86.76 93.553,95.804 91.44,97.917 v1(89.662,97.917)
RMII_REFCLK: R36.1 U1.24 | length 72.3
  Top Layer w0.254: U1.24 74.588,64.301 v1(78.232,67.945) ; R36.1 v1(77.47,112.395)
  Bottom Layer w0.254: v1(77.47,112.395) 83.82,106.045 86.995,106.045 94.261,98.779 94.261,86.429 78.359,70.527 78.359,68.072 v1(78.232,67.945)
RMII_RXD0: R32.1 U1.33 | length 55.7
  Top Layer w0.254: v1(63.146,71.247) 64.222,70.171 U1.33 ; R32.1 v1(89.662,95.885)
  Bottom Layer w0.254: v1(63.146,71.247) 63.146,71.655 65.532,74.041 80.295,74.041 93.199,86.945 93.199,94.126 91.44,95.885 v1(89.662,95.885)
RMII_RXD1: R31.1 U1.34 | length 54.2
  Top Layer w0.254: v1(63.119,73.025) 63.119,72.439 62.284,71.604 62.284,70.739 63.722,69.301 U1.34 ; R31.1 v1(89.662,93.853)
  Bottom Layer w0.254: v1@63.337,72.807 64.951,74.422 80.137,74.422 92.837,87.122 92.837,92.456 91.44,93.853 v1(89.662,93.853)
RMII_TXD0: R29.1 U1.51 | length 61.3
  Top Layer w0.254: v1(51.054,65.659) 51.912,64.801 U1.51 ; R29.1 69.342,110.998 v1(69.342,112.395)
  Bottom Layer w0.254: v1(51.054,65.659) 50.292,65.659 49.657,66.294 49.657,70.866 52.959,74.168 52.959,96.012 v1(69.342,112.395)
RMII_TXD1: R30.1 U1.52 | length 64.6
  Top Layer w0.254: v1(51.054,63.627) 51.728,64.301 U1.52 ; R30.1 67.31,110.998 v1(67.31,112.395)
  Bottom Layer w0.254: v1(51.054,63.627) 49.45,63.627 47.625,65.452 47.625,70.866 50.927,74.168 50.927,96.012 v1(67.31,112.395)
RMII_TXEN: R28.1 U1.48 | length 55.6
  Top Layer w0.254: v1(55.118,71.12) 55.245,71.12 55.245,69.977 56.722,68.5 U1.48 ; R28.1 71.374,110.998 v1(71.374,112.395)
  Bottom Layer w0.254: v1(55.118,71.12) 55.118,74.295 54.991,74.422 54.991,96.012 v1(71.374,112.395)
SPEED_K: CN1.10
SPI1_MOSI: U1.91
SPI1_SCK: U1.30
SPI2_MOSI: U1.18
SPI2_SCK: U1.47
SWCLK: P1.4 R3.2 U1.76 | length 20.4
  Top Layer w0.254: U1.76 55.722,52.674 56.642,53.594 v2(58.547,53.594) ; R3.2 60.071,41.783 61.087,40.767 61.087,36.83 60.325,36.068 P1.4
  Bottom Layer w0.254: 56.388,51.435 v2(58.547,53.594) ; P1.4 60.325,39.624
SWDIO: P1.2 R4.2 U1.72 | length 17.9
  Top Layer w0.254: v2(51.308,50.038) 51.308,53.594 52.015,54.301 U1.72 ; R4.2 58.801,40.541 58.801,37.846 57.785,36.83 P1.2
  Bottom Layer w0.254: P1.2 57.785,38.608
SWO: P1.6 R2.2 U1.89 | length 16.7
  Top Layer w0.254: R2.2 63.005,41.163 63.005,35.192 P1.6 ; U1.89 v2@62.222,52.959 ; v2(62.23,52.959) 62.23,53.467
  Bottom Layer w0.254: 62.23,52.451 v2(62.23,52.959) ; P1.6 62.865,41.148
TDI: P1.8 R1.2 U1.77 | length 26.1
  Top Layer w0.254: U1.77 56.222,52.285 56.642,52.705 59.944,52.705 v2(60.706,53.467) ; R1.2@64.198,42.128 65.059,42.128 65.405,41.783 P1.8
  Bottom Layer w0.254: v2(60.706,53.467) 61.214,53.975 62.738,53.975 63.246,53.467 63.246,52.07 ; P1.8 65.405,42.291
USART2_CK: U1.88
USART2_CTS: U1.84
USART3_CK: U1.57
USART3_CTS: U1.58
USB_ID: R21.1 U1.69 | length 18.8
  Top Layer w0.254: R21.1 42.672,57.432 42.672,60.833 42.926,61.087 45.346,61.087 50.632,55.801 U1.69
USB_N: R19.1 U1.70 | length 11.6
  Top Layer w0.381: R19.1 45.085,60.071 45.847,59.309 46.355,59.309 50.295,55.368 52.256,55.368 52.324,55.301 U1.70
USB_OVC: R17.1 U1.66 | length 17
  Top Layer w0.254: R17.1 v2(45.339,48.514) ; v2(51.689,57.277) 51.713,57.301 U1.66
  Bottom Layer w0.254: v2(45.339,48.514) 48.895,48.514 49.557,49.176 49.557,55.145 v2(51.689,57.277)
USB_P: R20.1 U1.71 | length 11.6
  Top Layer w0.381: R20.1 45.212,58.039 45.847,58.674 46.092,58.674 50.032,54.733 52.256,54.733 52.324,54.801 U1.71
USB_PWR: R16.1 U1.65 | length 25.4
  Top Layer w0.254: R16.1 v2(45.339,45.593) ; v2(50.546,57.531) 51.125,58.11 51.871,58.11 52.181,57.801 U1.65
  Bottom Layer w0.254: v2(45.339,45.593) 49.276,45.593 49.911,46.228 49.911,54.229 52.832,57.15 52.832,57.785 52.578,58.039 50.8,58.039 50.546,57.785 v2(50.546,57.531)
USB_VBUS: R18.1 U1.68 | length 12.1
  Top Layer w0.254: R18.1 44.958,62.103 50.76,56.301 U1.68
USBCON_N: P2.2 R19.2 | length 4.4
  Top Layer w0.381: P2.2 39.535,59.601 40.005,60.071 R19.2
USBCON_P: P2.3 R20.2 | length 4.5
  Top Layer w0.381: P2.3 39.37,58.801 40.132,58.039 R20.2
VCC: C1.1 C2.1 C3.1 C4.2 C5.2 C6.2 L1.1 P1.1 R1.1 R2.1 R4.1 R10.1 R11.2 R13.2 R14.2 R15.2 U1.6 U1.11 U1.19 U1.28 U1.50 U1.75 U1.100 | length 59.5
  Top Layer w0.254: R13.2 34.925,48.133 35.207,48.415 R15.2 R14.2 ; v1(53.415,66.802) U1.50@55.696,66.802 ; R4.1 56.106,39.215 55.245,38.354 55.245,33.401 56.134,32.512 P1.1 ; v1(65.659,64.516) 66.04,64.516 66.722,65.198 U1.28 ; v1(67.056,60.071) 67.056,60.579 68.278,61.801 U1.19 ; v1(67.437,57.785) 67.453,57.801 U1.11 ; v1(67.452,55.372) 67.381,55.301 U1.6
  Bottom Layer w0.254: v1(53.415,66.802) 54.578,66.802 C5.2
  Bottom Layer w1: C6.2 54.737,51.435 57.15,53.848 57.15,61.849 56.007,61.849 54.61,63.246 C5.2 ; 64.262,62.865 64.262,64.516 ; v1(65.659,64.516) 64.262,64.516 ; C4.2 64.992,66.77 64.262,66.04 64.262,64.516 ; C2.1 C3.1
VDD3V3: C18.2 C19.2 C20.2 C21.2 C22.2 C23.2 C24.2 C25.2 C30.2 C31.2 CN1.4 CN1.5 L2.1 R22.2 R23.2 R24.2 R25.2 R26.2 R27.2 R38.1 R39.1 U3.6 U3.9 | length 43.1
  Top Layer w0.254: CN1.4 50.927,93.98 51.816,93.091 C20.2 ; R39.1 C18.2 56.162,85.531 R26.2 ; R38.1 C19.2 56.162,102.556 R25.2 ; R27.2 53.562,91.881 C20.2 ; R24.2 53.562,96.333 C21.2 C20.2 ; U3.6 79.429,92.656 80.518,91.567 C24.2
  Bottom Layer w0.254: CN1.5 47.371,93.98 CN1.4
WEN: U1.90
pads on no net: CN1.7 P1.7 P2.MH1 P2.MH2 U1.7 U1.8 U1.9 U1.15 U1.17 U1.23 U1.26 U1.29 U1.31 U1.35 U1.36 U1.53 U1.54 U1.60 U1.61 U1.62 U1.63 U1.64 U1.67 U1.81 U1.82 U1.83 U1.92 U1.93 U1.95 U1.96 U2.3 U2.7 U2.8 U3.10
copper on no net:
  other v5: 39.751,87.62 39.751,99.06
  other v6: 42.801,85.4 42.801,101.28

## Keep-outs
Keep-Out Layer:
  the board outline again, w0.254

## Other copper
Top Layer:
  region net NetC9_2: 77.184,73.787 74.323,73.787 74.323,71.247 77.184,71.247
Bottom Layer:
  region net VCC: 70.485,58.547 56.515,58.547 56.515,54.356 70.485,54.356
  region net VCC: 66.04,63.5 56.515,63.5 56.515,58.547 66.04,58.547
  region net VCC: 68.072,60.833 66.04,60.833 66.04,58.547 68.072,58.547

## Text inside footprints (layer, text, board x,y; h text height)
P1: Top Overlay "2" at 55.245,34.544 h0.8; Top Overlay "1" at 55.753,32.004 h0.8; Top Overlay "9" at 69.469,32.004 h0.8; Top Overlay "10" at 69.469,34.544 h0.8
P2: Mechanical 1 "PCB Edge" at 28.778,62.837 h0.8 r270